# Altium PCB mixer.PcbDoc
Units mil, origin at the board's own origin, x right, y up, seen from the top; angles counter-clockwise.
Board outline 1490 x 1115 mil, 2 copper layers (Top Layer, Bottom Layer); 15 components, 8 nets, 58 pads, 25 vias.
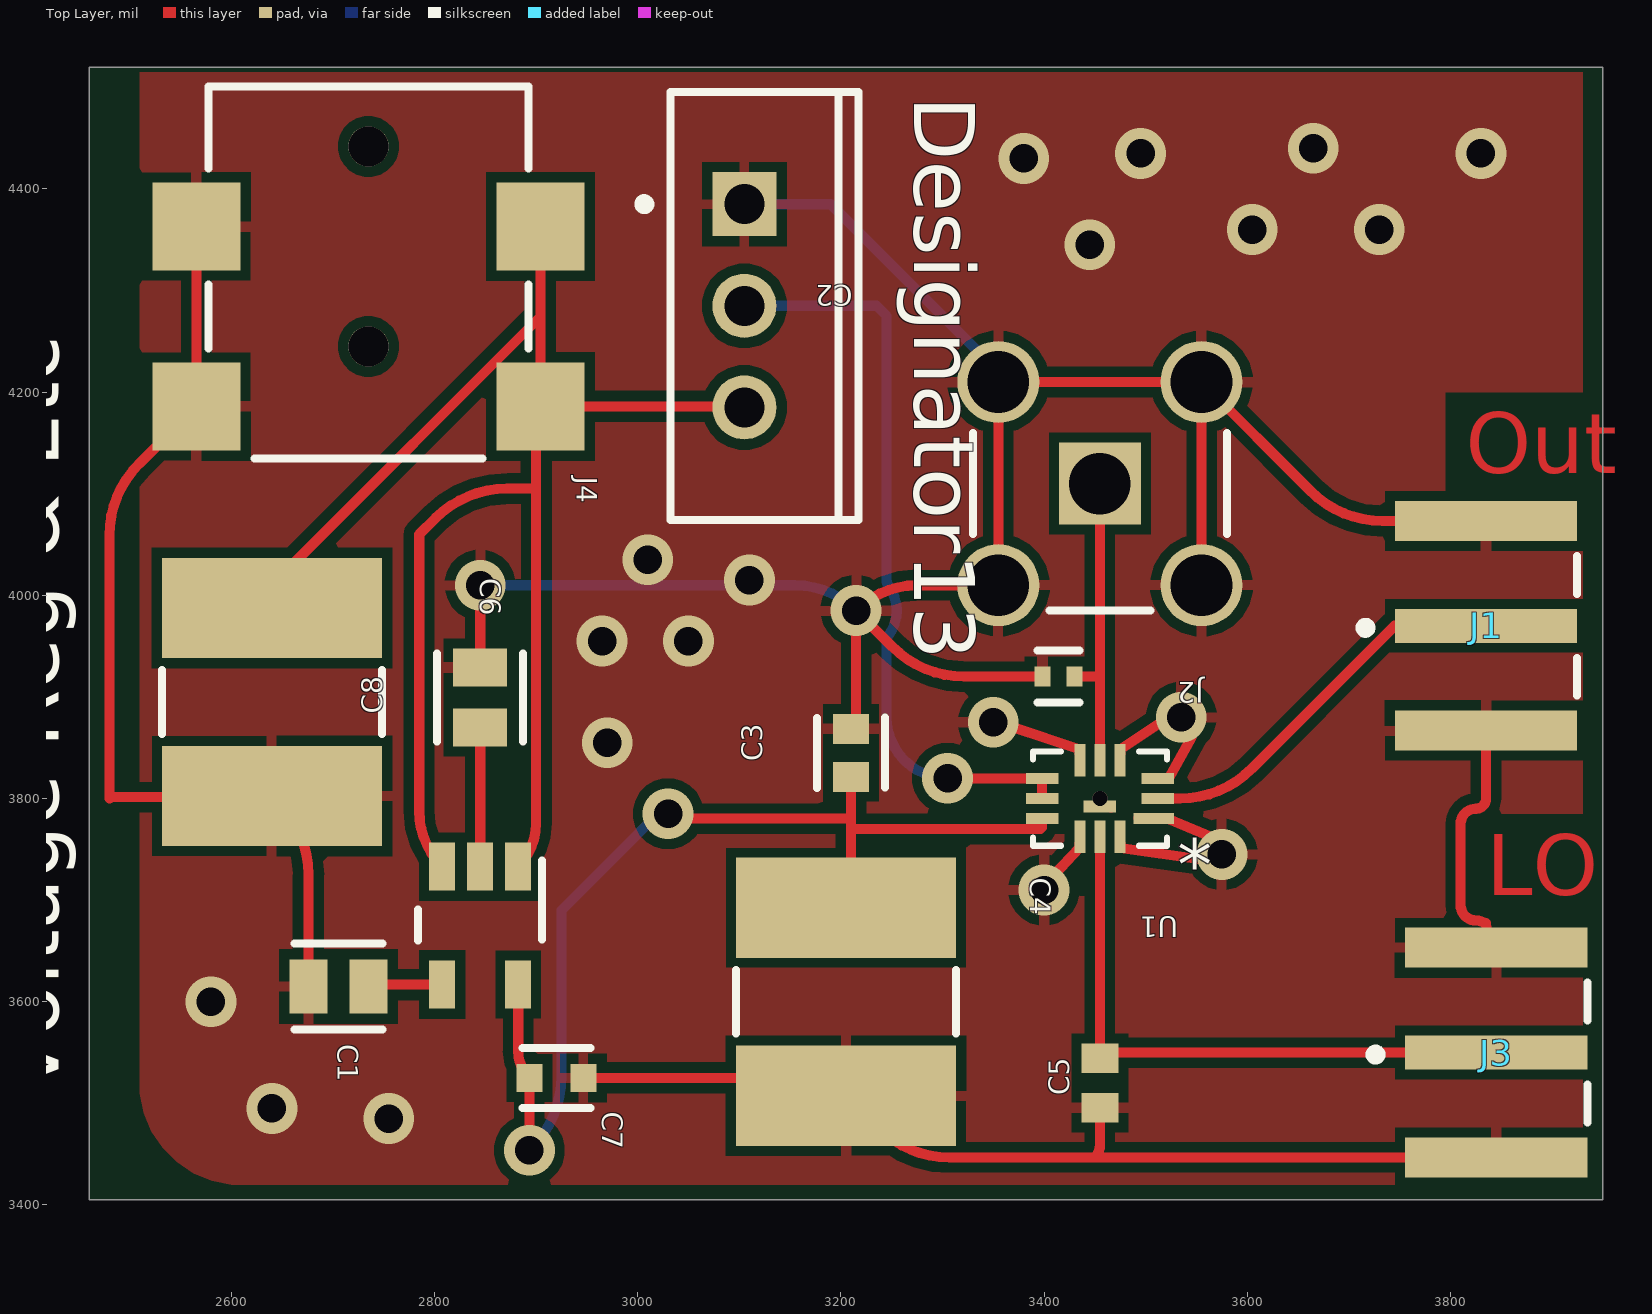
[diagram p0: Top Layer view]
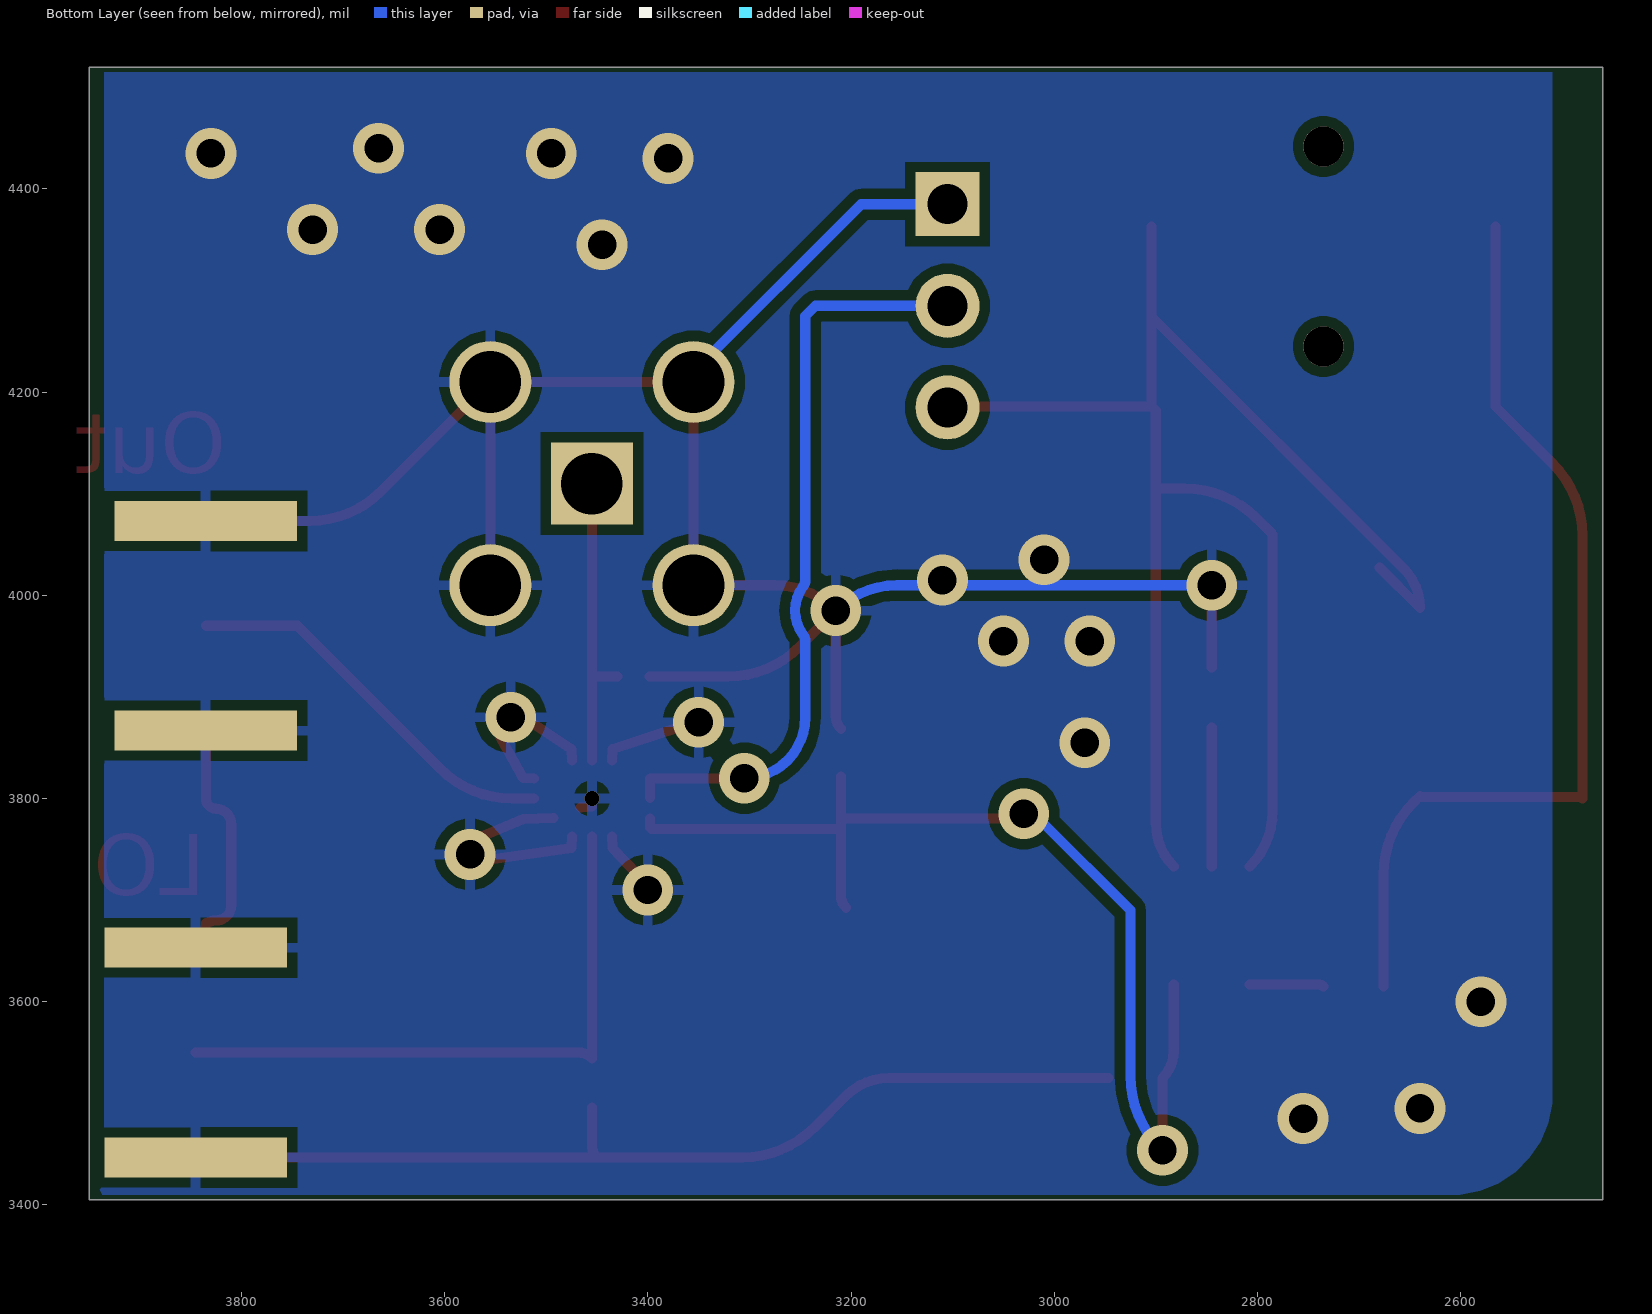
[diagram p1: Bottom Layer view, seen from below]
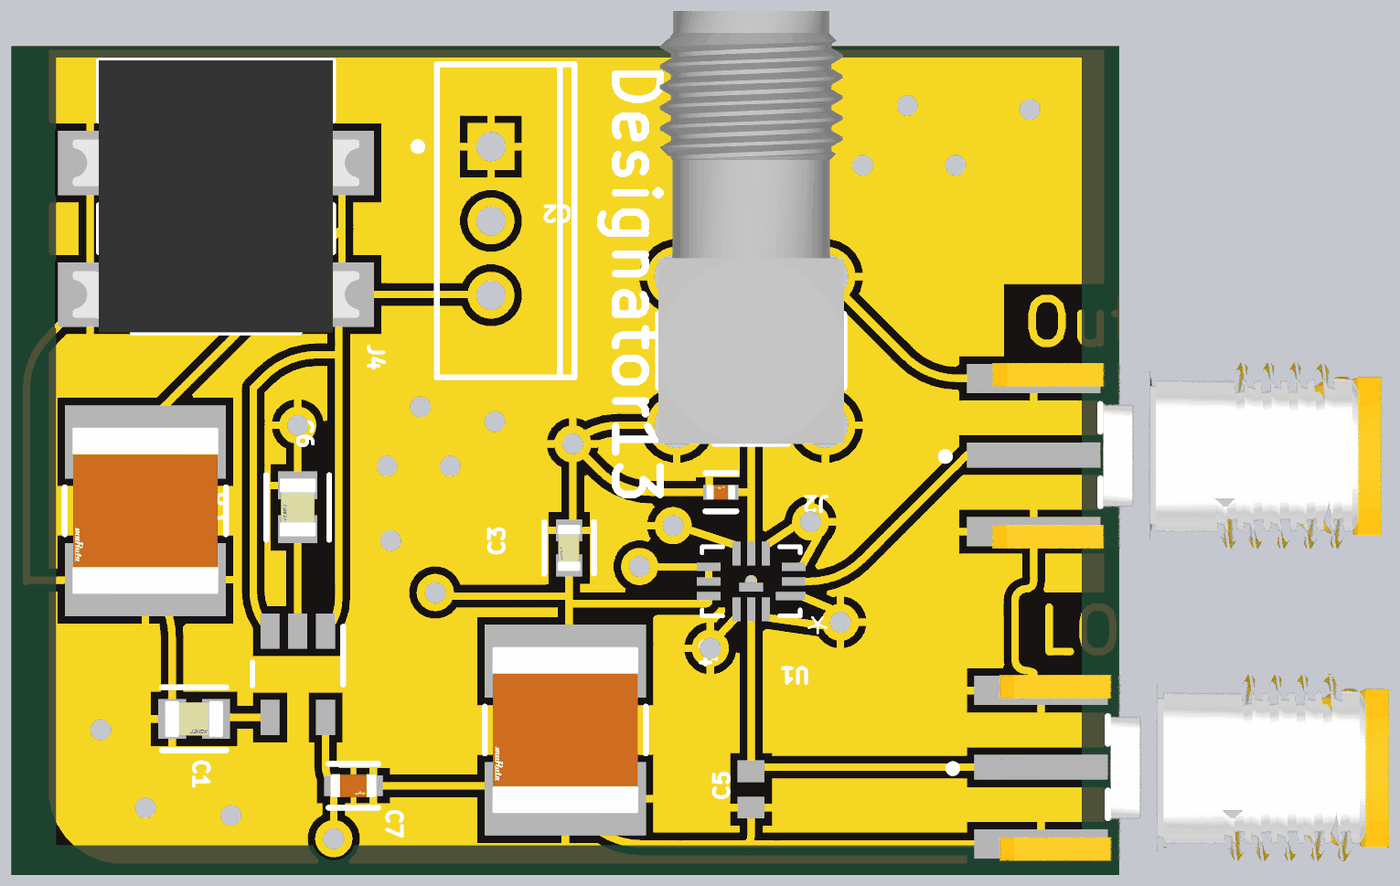
[diagram p2: 3D render of the assembled board from above, using the file's embedded part models]

## Layer stack, top to bottom
Top Solder: solder mask 0.4, Solder Resist, Dk 3.5
Top Layer: signal copper 1.4
Dielectric 1: dielectric 12.6, FR-4, Dk 4.8
Bottom Layer: signal copper 1.4
Bottom Solder: solder mask 0.4, Solder Resist, Dk 3.5

## Board outline
2460,3405 3950,3405 3950,4520 2460,4520

## Design rules (kind name [scope] priority, off if disabled: settings)
Clearance [All] p1: gap=10 ignorepadtopadclearanceinfootprint=FALSE ismatrix=TRUE
PolygonConnect [All] p1: connectstyle=Relief reliefconductorwidth=10 reliefentries=4 polygonreliefangle="90 Angle" airgapwidth=10
RoutingVias [All] p1: holewidth=28 width=50 viastyle="Through Hole" minholewidth=28 minwidth=50 maxholewidth=28 maxwidth=50
SolderMaskExpansion [All] p1: expansion=4 istentingtop=FALSE
Width [All] p1: maxlimit=10 minlimit=10 preferedwidth=10
30 further rules are at their usual default settings.

## Components (designator, comment, footprint, x,y, rotation, side; value= is the part's Value field where it differs from the comment)
C1 "C0805C103K2RACTU" FP-C0805C-DN-MFG 2705.47,3615 r180 top value="10,000 pF"
C2 "GCQ1555C1HR15BB01D" FP-GCQ155-0_05-MFG 3414.25,3920 r180 top
C3 "C0603C220J5GACTU" FP-C0603C-CF-MFG 3210,3845 r90 top value="22 pF"
C4 "GRM55DR72E105KW01L" FP-GRM55D-0_4-IPC_A 3205,3600 r270 top
C5 "06032U150GAT2A" CAPC1508X91X25LL25T13 3455,3520 r90 top
C6 "GRM55DR72E105KW01L" FP-GRM55D-0_4-IPC_A 2640,3895 r270 top
C7 "GRM188R71A225KE15D" FP-GRM188-0_1-e0_2_0_5-MFG 2920,3525 r0 top
C8 "C0805C103K2RACTU" FP-C0805C-DN-MFG 2845,3899.53 r90 top value="10,000 pF"
Designator13 "Comment" NDE0003A 3105,4285 r270 top
J1 "OUT" FP-EMPCB_SMAFSTJ_B_HT-MFG 4111.77,3970 r270 top
J2 "SMA IN" MOLX-731000114_V 3455,4110 r270 top
J3 "EMPCB.SMAFSTJ.B.HT" FP-EMPCB_SMAFSTJ_B_HT-MFG 4121.77,3550 r270 top
J4 "694102107102" 694102107102 2735,4317.84 r180 top
U1 "LTC5549IUDB#TRMPBF" LTC5549IUDBTRMPBF_ADI 3455,3800 r180 top
"Voltage Reg & Etc" "Comment" DBV0005A_M 2845,3675 r270 top (schematic designator U?)

## Footprints (in the part's own frame and the unit in brackets; to place one, negate y for a bottom-side part, rotate by r counter-clockwise, add the part's x,y. Pads: shape width x height; smd on the part's side, far side on the other; paste and mask are expansions set on the pad)
694102107102 [mm] "DC Power Jack Right Angled Low Profile SMT ?3.9 with 4 soldering pads & pegs"
  rect 2.2x2.2 smd: 1(-4.3,3.35) 1(-4.3,-1.15) 2(4.3,-1.15) 3(4.3,3.35)
  round 1 hole 1 unplated: MH1(0,1.85) MH2(0,-3.15)
  silkscreen extent -4,-4.65 4,4.65, body extent -4.9,-4.65 4.9,4.65, height 5.32
CAPC1508X91X25LL25T13 [mm] "Chip Capacitor, 2-Leads, Body 1.52x0.76mm, IPC High Density"
  rect 0.74x0.92 smd: 1(-0.62,0) 2(0.62,0)
  body extent -0.88,-0.51 0.89,0.51, height 0.91
DBV0005A_M [mm]
  rect 1.2x0.65 smd paste+0 mask+0.051: 1(-1.475,0.95) 2(-1.475,0) 3(-1.475,-0.95) 4(1.475,-0.95) 5(1.475,0.95)
  silkscreen extent -1.63,-1.55 0.38,1.55
FP-C0603C-CF-MFG [mm]
  rect 0.75x0.9 smd paste+0 mask+0: 1(-0.6,0) 2(0.6,0)
  silkscreen extent -0.87,-0.85 0.88,0.85, body extent -1.2,-0.6 1.2,0.6, height 0.25
FP-C0805C-DN-MFG [mm]
  rect 0.95x1.35 smd paste+0 mask+0: 1(-0.75,0) 2(0.75,0)
  silkscreen extent -1.1,-1.07 1.1,1.07, body extent -1.4,-0.85 1.4,0.85, height 0.25
FP-EMPCB_SMAFSTJ_B_HT-MFG [mm]
  rect 0.85x4.56 smd paste+0 mask+0: 1(0,-7.03)
  rect 1x4.56 smd paste+0 mask+0: 2(-2.62,-7.03) 3(2.62,-7.03)
  rect 1x4.56 smd far side paste+0 mask+0: 4(-2.62,-7.03) 5(2.62,-7.03)
  silkscreen extent -1.75,-10.17 1.75,-4.75, body extent -3.32,-9.41 3.32,5.35, height 0.25
FP-GCQ155-0_05-MFG [mm]
  rect 0.4x0.5 smd paste+0 mask+0: 1(-0.4,0) 2(0.4,0)
  silkscreen extent -0.53,-0.65 0.53,0.65, body extent -0.7,-0.38 0.7,0.38, height 0.25
FP-GRM55D-0_4-IPC_A [mil]
  rect 98.51x216.66 smd paste+0 mask+0: 1(-92.54,0) 2(92.54,0)
  silkscreen extent -31,-108 31,108, body extent -161,-128 161,128, height 10
FP-GRM188-0_1-e0_2_0_5-MFG [mm]
  rect 0.65x0.7 smd paste+0 mask+0: 1(-0.675,0) 2(0.675,0)
  silkscreen extent -0.85,-0.75 0.85,0.75, body extent -1.1,-0.55 1.1,0.55, height 0.25
LTC5549IUDBTRMPBF_ADI [mil]
  rect 40x11 smd paste+0 mask+0: 1(-53,19.69)
  rect 32x11 smd paste+0 mask+0: 2(-57,0) 3(-57,-19.69) 7(57,-19.69) 8(57,0) 9(57,19.69)
  rect 11x32 smd paste+0 mask+0: 4(-19.69,-37.5) 5(0,-37.5) 6(19.69,-37.5) 10(19.69,37.5) 11(0,37.5) 12(-19.69,37.5)
  rect 32x12 smd paste+0 mask+0: 13(0,7.97)
  silkscreen extent -66,-47 66,47
MOLX-731000114_V [mm] "Connector, 5-Leads, Body 14.8x6.35mm, Pitch 2.54mm"
  rect 2.05x2.05 hole 1.54: 1(0,0)
  round 2.05 hole 1.54: 2(-2.54,2.54) 3(-2.54,-2.54) 4(2.54,-2.54) 5(2.54,2.54)
  silkscreen extent -1.26,-3.18 3.18,3.18, body extent -11.62,-3.17 3.18,3.18, height 9.57
NDE0003A [mm] "FM, 3-Leads, Body 10.7x4.7mm, Pitch 2.54mm"
  rect 1.6x1.6 hole 1: 1(-2.54,0)
  round 1.6 hole 1: 2(0,0) 3(2.54,0)
  silkscreen extent -5.35,-2.62 5.35,2.85, body extent -5.4,-1.9 5.4,2.9, height 19.4

## Part data
C1 C8: library part CMP-2007-00259-2, "CAP CER 10000PF 200V X7R 0805", Capacitance="10,000 pF", Manufacturer=KEMET, Package=C0805C-DN, Temperature="-55°C to +125°C", Temperature Characteristic=X7R, Temperature Coefficient=30ppm/°C, Temperature Range High=+125°C, Temperature Range Low=-55°C, Tolerance=0.1, Voltage Rating="200 V", Automotive=No, Category=Cap, ComponentLink2Description=Datasheet, ComponentLink2URL=https://content.kemet.com/datasheets/KEM_C1003_C0G_SMD.pdf, Device Class L1="Passive Components", Device Class L2=Capacitors, Device Class L3="Ceramic Capacitors", Digikey Description="CAP CER 10000PF 200V X7R 0805", Height=0.88mm, Ipc Land Pattern Name=CAPC200125X78, Lead Free=Yes, Manufacturer Part Number=C0805C103K2RACTU, Material=Ceramic, Mouser Description="KEMET - C0805C103K2RACTU - CAP, MLCC, X7R, 10NF, 200V, 0805", Octopart=https://octopart.com/c0805c103k2ractu-kemet-9138347, RoHS=TRUE
C2: library part CMP-06035-056453-1, "High Q Ceramic Capacitor for Automotive 0.15pF ±0.1pF 50VDC C0G 0402 Paper T/R"
C3: library part CMP-2006-03119-3, "Cap Ceramic 22pF 50V C0G 5% SMD 0603 125°C Paper T/R", Capacitance="22 pF", Manufacturer=KEMET, Package=C0603C-CF, Temperature="-55°C to +125°C", Temperature Characteristic=C0G, Temperature Coefficient=30ppm/°C, Temperature Range High=+125°C, Temperature Range Low=-55°C, Tolerance=0.05, Voltage Rating="50 V", Automotive=Yes, Automotive Grade="Grade 1", Category=Cap, ComponentLink2Description=Datasheet, ComponentLink2URL=https://api.kemet.com/component-edge/download/datasheet/C0603C100J5GACAUTO.pdf, Device Class L1="Passive Components", Device Class L2=Capacitors, Device Class L3="Ceramic Capacitors", Digikey Description="Cap Ceramic 22pF 50V C0G 5% SMD 0603 125°C Paper T/R", Height=0.87mm, Lead Free=Yes, Manufacturer Part Number=C0603C220J5GACTU, Material=Ceramic, Mouser Description="Cap Ceramic 22pF 50V C0G 5% SMD 0603 125°C Paper T/R", Octopart=https://octopart.com/c0603c220j5gactu-kemet-98525, RoHS=TRUE
C4 C6: library part CMP-2000-06370-2, "Chip Multilayer Ceramic Capacitors for General Purpose, 2220, 1.0uF, X7R, 15%, 10%, 250V", Capacitance=1uF, Case Code (Imperial)=2220, Case Code (Metric)=5750, Dielectric=X7R, Max Operating Temperature=125°C, Min Operating Temperature=-55°C, Package Quantity=1, Tolerance=10%, Voltage=250V, Case/Package=2220, Depth=5mm, Height=2mm, Lead Free="Lead Free", Length=5.7mm, Material=Ceramic, Mount="Surface Mount", Number of Pins=2, Packaging="Tape and Reel", REACH SVHC="No SVHC", Termination=SMD/SMT, Thickness=0.087inch, Voltage Rating=250V, Voltage Rating (DC)=250V, Width=5mm
C5: library part CMP-2006-04659-1, Manufacturer="AVX Interconnect / Elco", Part Number=06032U150GAT2A
C7: library part CMP-2006-02836-2, "Chip Multilayer Ceramic Capacitors for General Purpose, 0603, 2.2uF, X7R, 15%, 10%, 10V", Capacitance=2.2uF, Case Code (Imperial)=0603, Case Code (Metric)=1608, Dielectric=X7R, Max Operating Temperature=125°C, Min Operating Temperature=-55°C, Package Quantity=1, Tolerance=10%, Voltage=10V, Case/Package=0603, Depth=0.8mm, Height=0.8mm, Lead Free="Lead Free", Length=1.6mm, Material=Ceramic, Mount="Surface Mount", Number of Pins=2, Packaging="Cut Tape", REACH SVHC="No SVHC", Termination=SMD/SMT, Thickness=0.035inch, Voltage Rating=10V, Voltage Rating (DC)=10V, Weight=7.1E-05oz, Width=0.031inch
J1: library part CMP-111093-000001-1, "CONN SMA JACK STR 50OHM EDGE MNT", Frequency=12.4GHz, Manufacturer="Taoglas Limited", Manufacturer Part Number=EMPCB.SMAFSTJ.B.HT, Package=0, Temperature="-40°C to +85°C", Temperature Range High=+85°C, Temperature Range Low=-40°C, Voltage Rating=335V, Automotive=No, Category=Conn, ComponentLink2Description=Datasheet, ComponentLink2URL=https://cdn.taoglas.com/datasheets/EMPCB.SMAFSTJ.B.HT.pdf, Conn Orientation=Horizontal, Contact Material=Gold, Device Class L1=Connectors, Device Class L2="RF / Coaxial Connectors", Device Class L3=unset, Digikey Description="CONN SMA JACK STR 50OHM EDGE MNT", Impedance=50Ω, Is Female=yes, Lead Free=Yes, Mouser Description="RF Connectors / Coaxial Connectors SMA Straight Edge Mount PCB Jack-Gold", Number Of Contacts=1, Octopart=https://octopart.com/empcb.smafstj.b.ht-taoglas-24204431, Pitch=2.62mm, RoHS=TRUE
J2: library part CMP-2000-05487-1, "SMA Right-Angle PCB Jack Receptacle, Brass Body, Gold Plated, 50 Ohm, 5-Pin THD, RoHS, Tray", Manufacturer=Molex, Package Description="5-Pin Through Hole Device, Body 14.8 x 6.35 mm, Pitch 2.54 mm", Package Reference=731000114, Datasheet URL=http://www.molex.com/webdocs/datasheets/pdf/en-us/0731000114_RF_COAX_CONNECTORS.pdf, Datasheet Version=09/2016, Manufacturer URL=http://www.molex.com/, Mounting Technology=ThroughHole, Package URL=http://www.molex.com/pdm_docs/sd/731000114_sd.pdf
J3: library part CMP-111093-000001-1, "CONN SMA JACK STR 50OHM EDGE MNT", Frequency=12.4GHz, Manufacturer="Taoglas Limited", Package=0, Temperature="-40°C to +85°C", Temperature Range High=+85°C, Temperature Range Low=-40°C, Voltage Rating=335V, Automotive=No, Category=Conn, ComponentLink2Description=Datasheet, ComponentLink2URL=https://cdn.taoglas.com/datasheets/EMPCB.SMAFSTJ.B.HT.pdf, Conn Orientation=Horizontal, Contact Material=Gold, Device Class L1=Connectors, Device Class L2="RF / Coaxial Connectors", Device Class L3=unset, Digikey Description="CONN SMA JACK STR 50OHM EDGE MNT", Impedance=50Ω, Is Female=yes, Lead Free=Yes, Manufacturer Part Number=EMPCB.SMAFSTJ.B.HT, Mouser Description="RF Connectors / Coaxial Connectors SMA Straight Edge Mount PCB Jack-Gold", Number Of Contacts=1, Octopart=https://octopart.com/empcb.smafstj.b.ht-taoglas-24204431, Pitch=2.62mm, RoHS=TRUE
J4: library part CMP-1502-00174-2, Color=Black, Current Rating=5A, Flammability Rating="UL94 V-0", Insulation Resistance=100MΩ, Max Operating Temperature=85°C, Min Operating Temperature=-40°C, Operating Supply Voltage=18V, Connector Type=Power, Contact Gender=Female, Contact Plating=Tin, Gender=Male, Housing Material=Polyamide, Mount="Surface Mount", NexarPartId=52645180, Packaging="Tape and Reel", REACH SVHC=Unknown, RoHS=Compliant, Shielding=Unshielded, Termination=SMD/SMT, Voltage Rating=18V, Voltage Rating (DC)=18V
U1: library part LTC5549IUDBTRMPBF, "No Description Available", Mfr_Name="Analog Devices Inc", Copyright="Copyright (C) 2024 Ultra Librarian. All rights reserved.", Manufacturer_Part_Number=LTC5549IUDB#TRMPBF, RefDes=RefDes, Type=DEV
"Voltage Reg & Etc": library part CMP-0062-02540-3, "3A Low Dropout Positive Regulators, 3-pin TO-220, Pb-Free", Manufacturer="Texas Instruments", PackageTopMarking=NSUZXYTTE#*LM1085*IT-3.3, PowerWise=N, ComponentLink1Description="Datasheet URL", ComponentLink1URL=http://www.ti.com/general/docs/lit/getliterature.tsp?genericPartNumber=LM1085&fileType=pdf, CompType="LDO IC", PackageDescription="TO-220, Molded, 3 Lead, Straight", PackageReference=NDE0003A, PinCount=3, RoHS=Y

## Via types
v1: diameter 50, hole 28, Top Layer to Bottom Layer, 24 vias
v2: diameter 15, hole 15, Top Layer to Bottom Layer, 1 vias

## Nets (pads, with @x,y where several pads share a name; then routed paths per layer and width w, separated by ;. In a path a pad name is that pad's centre, name@x,y a point inside that pad or via, vN(x,y) a via of type N, cw(c..) or ccw(c..) an arc to the next point about the centre after c; other vN are vias at no path point)
GND: C1.2 C2.2 C3.2 C4.2 C5.1 C6.2 C7.2 C8.2 Designator13.1 J1.2 J1.3 J1.4 J1.5 J2.2 J2.3 J2.4 J2.5 J3.2 J3.3 J3.4 J3.5 J4.2 J4.3 U1.1 U1.3 U1.4 U1.6 U1.10 U1.12 U1.13 | length 4474.8
  Top Layer w10: J4.2 J4.3 2509.29,4129.53 ccw(c2580,4058.81) 2480,4058.81 2480,3800 cw(c2483.43,3796.57) 2483.43,3801.42 C6.2@2640,3801.42 ; C6.2 2646.66,3795.81 cw(c2575.94,3725.1) 2675.94,3725.1 C1.2 ; C8.2 v1(2845,4010) ; C7.2 3162.66,3525 cw(c3162.66,3465.12) C4.2 3236.32,3476.14 ccw(c3307.03,3546.85) 3307.03,3446.85 3450,3446.85 ; C3.2 ccw(c3197.93,3880.69) 3215,3880.69 v1(3215,3985) ; v1@3370,3870 3434.81,3848.5 U1.6 ; C2.2 3321.42,3920 cw(c3321.42,4020) 3250.71,3949.29 v1(3215,3985) ; v1@3410,3725 3434.81,3751.5 U1.10 ; C5.1 3455,3458.92 cw(c3437.93,3458.92) 3450,3446.85 ; U1.13 U1.13@3466,3791.03 ; U1.12 3475.19,3751.5 v1@3555,3740 ; U1.4 3475.19,3848.5 v1@3515,3875 ; U1.1@3493,3780.81 U1.1 3523,3779.81 v1@3570,3760 ; U1.3 3523,3820.19 v1@3545,3860 ; J2.5 J2.2 ; J1.3 3835,3799.98 cw(c3825,3799.98) 3825,3789.98 ccw(c3825,3774.98) 3810,3774.98 3810,3695 ccw(c3825,3695) 3825,3680 3825.65,3680 cw(c3825.61,3670) 3828.93,3679.43 3835,3677.29 ccw(c3869.14,3677.29) J3.2 ; J1.2 3733.27,4073.15 cw(c3733.27,4173.15) 3662.56,4102.44 J2.2 ; J3.3 3450,3446.85 ; v1(3215,3985) cw(c3275.36,3924.64) 3275.36,4010 J2.4 J2.3 J2.2
  Bottom Layer w10: v1(2845,4010) 3154.64,4010 cw(c3154.64,3924.64) v1(3215,3985) ; v1@3335,3875 v1(3350,3875)
  other v1: 2755,3485 2640,3495 2580,3600 3400,3710 3575,3745 2970,3855 3535,3880 2965,3955 3050,3955 3110,4015 3010,4035 3445,4345 3605,4360 3730,4360 3380,4430 3495,4435 3830,4435 3665,4440
  other v2: 3455,3800
NetC1_1: "Voltage Reg & Etc.4" C1.1 | length 73.1
  Top Layer w10: C1.1 cw(c2739.66,3610.34) 2739.66,3616.93 2807.6,3616.93
NetC2_1: C2.1 J2.1 U1.5 | length 297.5
  Top Layer w10: C2.1 3455,3920 ; U1.5 3455,3920 ; J2.1 3455,3920
NetC5_2: C5.2 J3.1 U1.11 | length 609.6
  Top Layer w10: U1.11 C5.2 cw(c3468.5,3530.91) 3468.5,3550 J3.1
NetC6_1: "Voltage Reg & Etc.1" "Voltage Reg & Etc.3" C6.1 Designator13.3 J4.1 | length 1750.7
  Top Layer w10: C6.1@2680,4027.54 C6.1 cw(c2694.8,3987.54) 2656.05,4026.29 2904.29,4274.53 ; 2807.6,3733.07 cw(c2862.16,3787.63) 2785,3787.63 2785,4060 2800.71,4075.71 cw(c2871.42,4005) 2871.42,4105 2900,4105 ; 2882.4,3733.07 ccw(c2839.92,3775.56) 2900,3775.56 2900,4105 ; J4.1@2904.29,4363.11 2904.29,4274.53 ; Designator13.3 ccw(c3104.06,4185) 3104.06,4185.94 J4.1@2904.29,4185.94 ; 2900,4105 2900,4181.65 J4.1@2904.29,4185.94 ; J4.1@2904.29,4185.94 2904.29,4274.53
NetC8_1: "Voltage Reg & Etc.2" C8.1 | length 136.9
  Top Layer w10: 2845,3733.07 C8.1
NetJ1_1: J1.1 U1.2 | length 389.1
  Top Layer w10: U1.2 3533.58,3800 ccw(c3533.58,3900) 3604.29,3829.29 3745,3970 J1.1
VCC: "Voltage Reg & Etc.5" C3.1 C4.1 C7.1 U1.9 | length 1066.3
  Top Layer w10: 2882.4,3616.93 2882.4,3551.61 ccw(c2920.04,3551.61) C7.1 v1(2893.43,3453.8) ; v1(3030,3785) ccw(c3041.32,3796.32) 3041.32,3780.31 3210,3780.31 ; C4.1 ccw(c3192.93,3704.61) 3210,3704.61 3210,3770 ; C3.1 3210,3780.31 ; U1.9 3398,3773 cw(c3395,3773) 3395,3770 3210,3770 ; 3210,3770 3210,3780.31
  Bottom Layer w10: v1(2893.43,3453.8) 2895.71,3456.09 ccw(c2825,3526.8) 2925,3526.8 2925,3690 3011.46,3776.46 ccw(c3002.93,3785) 3015,3785 v1(3030,3785)
pads on no net: Designator13.2 J4.MH1 J4.MH2 U1.7 U1.8
copper on no net: | length 1073.3
  Top Layer w10: v1@3310,3820 3310,3819.69 3398,3819.69 3398,3800.81
  Bottom Layer w10: 3105,4285 3235,4285 3245,4275 3245,4015 ccw(c3255,4015) 3247,4009 cw(c3215,3985) 3247,3961 ccw(c3255,3955) 3245,3955 3245,3880 ccw(c3305,3880) v1(3305,3820) ; 3105,4385 3190,4385 3355,4220 3355,4210

## Polygon pours and split planes (outlines as drawn)
GND on Bottom Layer "GND_L02_P002" (solid, pour order 2): 2510,4515 2510,3510 ccw(c2610,3510) 2610,3410 3955,3410 cw(c3955,3430) 3935,3430 3935,4515
GND on Top Layer "GND_L01_P003" (solid, pour order 3): 2510,4515 2510,3520 ccw(c2610,3520) 2610,3420 3930,3420 3930,4515

## Other copper
Top Layer:
  text "Out" at 3815,4120 h60
  text "LO" at 3835,3705 h60

## Silkscreen, mask and mechanical layers (free items; w line width, h text height)
Top Solder:
  rectangle: 2520,3445 3900,4505
Bottom Solder:
  rectangle: 2525,3430 3920,4510

## Text inside footprints (layer, text, board x,y; h text height)
U1: Top 3D Body "*" at 3508.5,3828.5 h50 r180; Top Overlay "*" at 3565.5,3780.47 h50 r180